# EAGLE board 6way (EAGLE 5.12)
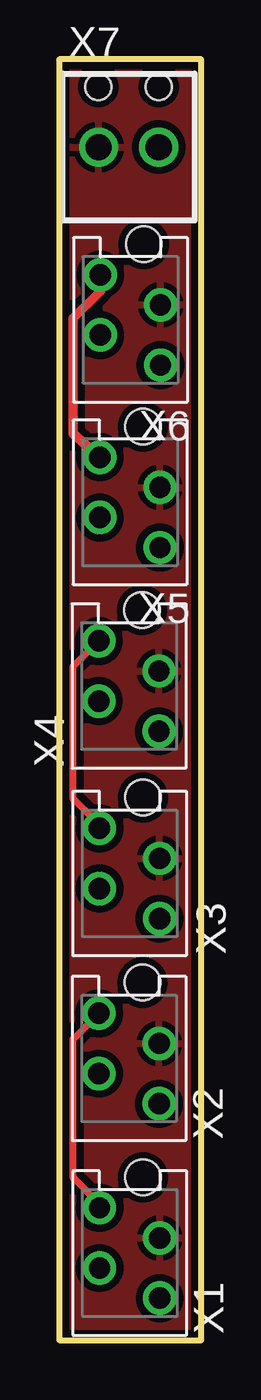
[diagram p0: board, top side]
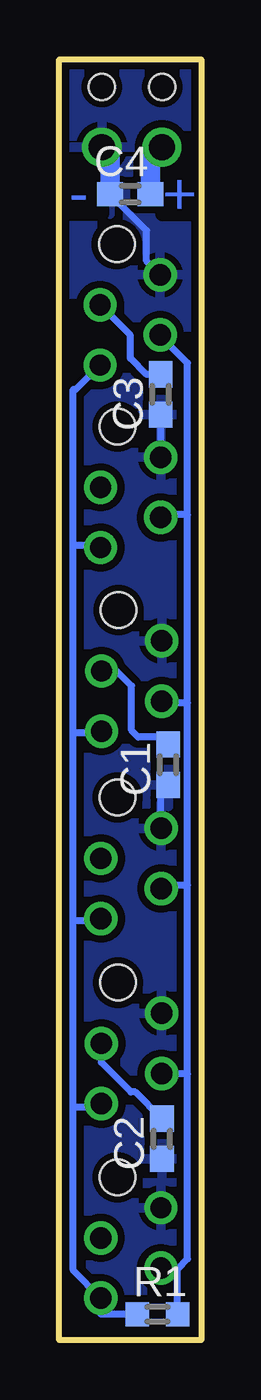
[diagram p1: board, bottom side, seen from below]

Size 6 x 54 mm. Coordinates in mm from the lower left corner, seen from the top.
Outline: 6,0 6,54 0,54 0,0 6,0
Copper layers (1*16): Top 0.035mm / dielectric 1.5mm / Bottom 0.035mm
Design rules "ITead_rule *": minimum track width 6mil, minimum drill 12mil, track to track 6mil, track to pad 6mil, pad to pad 6mil, via to via 6mil, smd to smd 0mil, copper to edge 10mil, drill to drill 10mil, minimum pad ring 10mil, minimum via ring 6mil, stop-mask expansion 2mil, vias tented up to drill 100mil, thermal gap 10mil

## Footprints (pad centres in the part's own frame; a part is rotated, then mirrored left to right if it is on the bottom)
C0603 = smd 1.1 x 1: 1 -0.85,0; 2 0.85,0
R0603 = smd 0.991 x 1.016: 1 -0.85,0; 2 0.85,0
MICROMATCH-4 = drill 0.9 round: 1 1.905,1.27; 2 0.635,-1.27; 3 -0.635,1.27; 4 -1.905,-1.27 | hole 1.5: 3.199,-0.562
PCB2 = drill 1.1 round: 1 -2.54,0; 2 0,0 | hole 1.1: -2.54,2.54; 0,2.54

## Placement (x,y rotation side)
C1  [C0603]  1.4,24.27 90 bottom
C2  [C0603]  1.66,8.49 90 bottom
C3  [C0603]  1.71,39.87 90 bottom
C4  [C0603]  3,48.31 0 bottom
R1  [R0603]  1.86,1.09 0 bottom
X1  MICROMATCH-4  [MICROMATCH-4]  2.97,3.68 90 top
X2  MICROMATCH-4  [MICROMATCH-4]  2.95,11.88 90 top
X3  MICROMATCH-4  [MICROMATCH-4]  2.97,19.68 90 top
X4  MICROMATCH-4  [MICROMATCH-4]  2.94,27.58 90 top
X5  MICROMATCH-4  [MICROMATCH-4]  2.98,35.32 90 top
X6  MICROMATCH-4  [MICROMATCH-4]  3.01,43.01 90 top
X7  BLOCK22.54  [PCB2]  4.2,50.3 0 top

## Library data of the parts
C1-C4 R1 = rcl
X1-X6 = con-amp-micromatch
X7 = terminal_block

## Nets
CANH: R1.1 X1.4 X2.4 X3.4 X4.4 X5.4 X6.4
CANL: R1.2 X1.3 X2.3 X3.3 X4.3 X5.3 X6.3
GND: C1.1 C2.1 C3.1 C4.1 X1.1 X2.1 X3.1 X4.1 X5.1 X6.1 X7.2
VCC_ARNE: C1.2 C2.2 C3.2 C4.2 X1.2 X2.2 X3.2 X4.2 X5.2 X6.2 X7.1

## Tracks (layer width: path | path; a pad name or v marks a point on that pad's centre or on a via)
CANH
  Bottom 0.305: R1.1 4.24,1.09 X1.4 5.41,2.94 5.41,9.83 | 5.41,9.83 5.41,17.7 | 5.41,17.7 5.41,25.63 | 5.41,25.63 5.41,33.53 | 5.41,33.53 5.41,40.08 5.3,40.08 X6.4 | X5.4 4.37,33.53 5.41,33.53 | X4.4 4.25,25.63 5.41,25.63 | X3.4 4.3,17.7 5.41,17.7 | X2.4 4.36,9.83 5.41,9.83
CANL
  Bottom 0.305: 1.01,3.04 X1.3 | R1.2 1.01,3.04 | 0.58,11.23 0.58,3.43 0.97,3.04 1.01,3.04 | 0.58,11.23 0.58,19.18 | 0.58,19.18 0.58,26.87 | 0.58,26.87 0.58,34.8 | 0.58,34.8 0.58,41.2 1.74,42.35 X6.3 | X2.3 1.66,11.23 0.58,11.23 | X3.3 1.56,19.18 0.58,19.18 | X4.3 1.6,26.87 0.58,26.87 | X5.3 1.6,34.8 0.58,34.8
GND
  Top 0.305: X2.1 0.58,12.69 0.58,6.86 1.7,5.74 X1.1 | X4.1 0.58,28.39 0.58,22.84 1.7,21.72 X3.1
  Top 0.406: X6.1 1.74,44.23 0.58,43.08 0.58,38.23 X5.1
  Bottom 0.305: X5.1 | X5.1 C3.1 | X6.1 2.31,45.49 2.31,46.78 C4.1 | C1.1 1.7,23.11 X3.1
  Bottom 0.813: X7.2 3.85,49.95 C4.1
  pour Bottom (isolate 0.305): 0.3,0.3 0.3,53.7 5.7,53.7 5.7,0.3
VCC_ARNE
  Bottom 0.305: X6.2 3,42.37 3,41.4 2.31,40.72 C3.2 | X4.2 3.57,28.21 2.95,27.58 2.95,25.7 2.67,25.43 1.55,25.43 1.4,25.27 C1.2 | C2.2 2.79,10.46 2.97,10.46 4.22,11.71 X2.2
  Bottom 0.813: X7.1 2.15,49.81 C4.2
  pour Top (isolate 0.305): 0.3,0.3 0.3,53.7 5.7,53.7 5.7,0.3

## Text on the board
Bottom: + | -